# EAGLE board pcb_v2.1 (EAGLE 9.1.0)
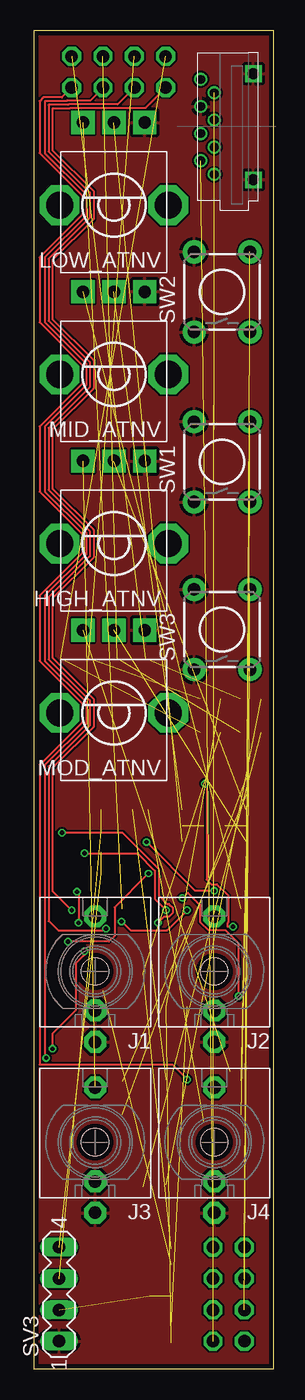
[diagram p0: board, top side]
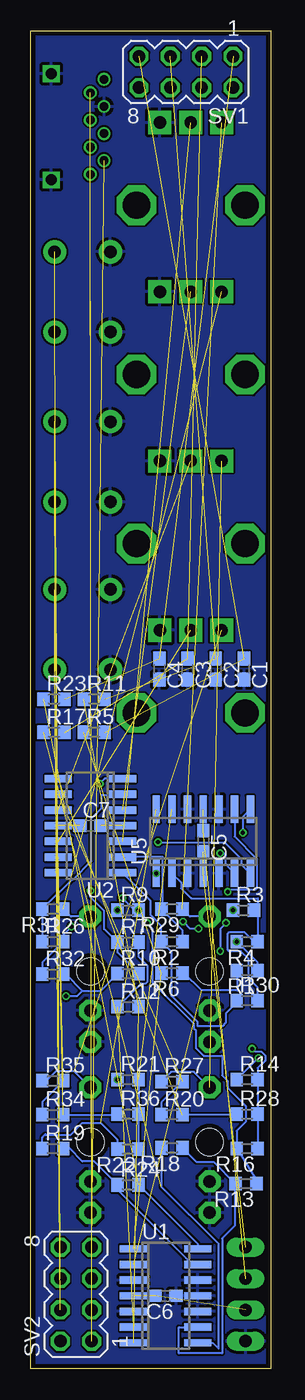
[diagram p1: board, bottom side, seen from below]

Size 19.43 x 108.43 mm. Coordinates in mm from the lower left corner, seen from the top.
Outline: 0,0 19.43,0 19.43,108.43 0,108.43 0,0
Copper layers (1*16): Top 0.035559375mm / dielectric 1.6mm / Bottom 0.035559375mm
Design rules "oshpark-2layer": minimum track width 6mil, minimum drill 10mil, track to track 6mil, track to pad 6mil, pad to pad 6mil, via to via 6mil, smd to smd 6mil, copper to edge 15mil, drill to drill 6mil, minimum pad ring 5mil, minimum via ring 5mil, stop-mask expansion 2.5mil, vias tented up to drill 0mil, thermal gap 10mil

## Footprints (pad centres in the part's own frame; a part is rotated, then mirrored left to right if it is on the bottom)
C0603 = smd 1.1 x 1: 1 -0.85,0; 2 0.85,0
ALPS_POT_VERTICAL = drill 1 pad 1.88 square: P$1 -2.5,6.7; P$2 0,6.7; P$3 2.5,6.7 | drill 2.2 pad 3.175 octagon: P$4 -4.4,0; P$5 4.4,0
WQP_PJ_301M6 = drill 1.016 pad 1.778 octagon: P1 0,-5.715; P2 0,-3.175; P3 0,4.445 | hole 2.2: 0,0
R0603 = smd 1 x 1.1: 1 -0.85,0; 2 0.85,0
MA04-2 = drill 1.016 octagon: 1 -3.81,-1.27; 2 -3.81,1.27; 3 -1.27,-1.27; 4 -1.27,1.27; 5 1.27,-1.27; 6 1.27,1.27; 7 3.81,-1.27; 8 3.81,1.27
MA04-1 = drill 1.016 long: 1 -3.81,0; 2 -1.27,0; 3 1.27,0; 4 3.81,0
TACTILE-PTH = drill 1.016 pad 1.88: 1 -3.251,2.261; 2 3.251,2.261; 3 -3.251,-2.261; 4 3.251,-2.261
SO14 = smd 0.6 x 2.2: 1 -3.81,-2.6; 2 -2.54,-2.6; 3 -1.27,-2.6; 4 0,-2.6; 5 1.27,-2.6; 6 2.54,-2.6; 7 3.81,-2.6; 8 3.81,2.6; 9 2.54,2.6; 10 1.27,2.6; 11 0,2.6; 12 -1.27,2.6; 13 -2.54,2.6; 14 -3.81,2.6
YAMAICHI_MICROSD_VERTICAL = drill 0.9 square: GND1 -4.3,-3.17; GND2 4.3,-3.17 | drill 0.7: P$1 -3.85,0; P$2 -2.75,1.1; P$3 -1.65,0; P$4 -0.55,1.1; P$5 0.55,0; P$6 1.65,1.1; P$7 2.75,0; P$8 3.85,1.1

## Placement (x,y rotation side)
C1  100n  [C0603]  2.16,56.71 270 bottom
C2  100n  [C0603]  4.45,56.71 270 bottom
C3  100n  [C0603]  6.73,56.71 270 bottom
C4  100n  [C0603]  9.02,56.71 270 bottom
C5  100n  [C0603]  5.46,42.74 270 bottom
C6  100n  [C0603]  8.51,5.91 180 bottom
C7  100n  [C0603]  14.61,44.01 0 bottom
HIGH_ATNV  10kB  [ALPS_POT_VERTICAL]  6.48,66.87 0 top
J1  PJ301_THONKICONN6  [WQP_PJ_301M6]  4.95,32.19 0 top
J2  PJ301_THONKICONN6  [WQP_PJ_301M6]  14.61,32.19 0 top
J3  PJ301_THONKICONN6  [WQP_PJ_301M6]  4.95,18.35 0 top
J4  PJ301_THONKICONN6  [WQP_PJ_301M6]  14.61,18.35 0 top
LOW_ATNV  10kB  [ALPS_POT_VERTICAL]  6.48,94.3 0 top
MID_ATNV  10kB  [ALPS_POT_VERTICAL]  6.48,80.58 0 top
MOD_ATNV  10kB  [ALPS_POT_VERTICAL]  6.48,53.15 0 top
R1  10k  [R0603]  1.91,32.27 180 bottom
R2  100k  [R0603]  8,34.61 180 bottom
R3  100k  [R0603]  2.21,37.15 0 bottom
R4  100k  [R0603]  1.91,34.61 180 bottom
R5  100  [R0603]  14.3,51.57 0 bottom
R6  10k  [R0603]  8,32.07 180 bottom
R7  10k  [R0603]  11.56,34.56 0 bottom
R9  100k  [R0603]  11.56,37.15 0 bottom
R10  100k  [R0603]  11.56,32.02 0 bottom
R11  100  [R0603]  14.3,54.27 0 bottom
R12  10k  [R0603]  11.56,29.32 0 bottom
R13  10k  [R0603]  2.01,15 180 bottom
R14  100k  [R0603]  1.91,23.43 0 bottom
R16  100k  [R0603]  1.91,17.84 180 bottom
R17  100  [R0603]  17.55,51.57 0 bottom
R18  10k  [R0603]  8,17.89 180 bottom
R19  10k  [R0603]  17.65,17.84 0 bottom
R20  100k  [R0603]  8,20.59 0 bottom
R21  100k  [R0603]  11.56,23.43 0 bottom
R22  100k  [R0603]  11.56,17.79 180 bottom
R23  100  [R0603]  17.55,54.27 0 bottom
R24  10k  [R0603]  11.56,14.9 0 bottom
R26  100k  [R0603]  17.65,34.61 0 bottom
R27  100k  [R0603]  8,23.28 0 bottom
R28  100k  [R0603]  1.91,20.64 0 bottom
R29  100k  [R0603]  8,37.25 180 bottom
R30  100k  [R0603]  1.91,29.83 0 bottom
R31  100k  [R0603]  17.65,37.25 180 bottom
R32  100k  [R0603]  17.65,31.97 0 bottom
R34  100k  [R0603]  17.65,20.59 0 bottom
R35  100k  [R0603]  17.65,23.33 0 bottom
R36  100k  [R0603]  11.56,20.64 0 bottom
SV1  [MA04-2]  6.86,105.09 180 bottom
SV2  [MA04-2]  15.77,6.03 90 bottom
SV3  [MA04-1]  2.03,6.03 90 top
SW1  [TACTILE-PTH]  15.24,73.49 90 top
SW2  [TACTILE-PTH]  15.24,87.26 90 top
SW3  [TACTILE-PTH]  15.24,59.91 90 top
U1  MCP6004  [SO14]  8.51,5.91 270 bottom
U2  TL074_SMD  [SO14]  14.61,44.01 90 bottom
U5  TL074  [SO14]  5.46,42.74 0 bottom
U$1  YAMAICHI_SD_CARD  [YAMAICHI_MICROSD_VERTICAL]  14.61,100.65 90 top

## Library data of the parts
C1-C7 = rcl; SPICEPREFIX: C
HIGH_ATNV LOW_ATNV MID_ATNV MOD_ATNV = og-pots
J1-J4 = og-pj301; SPICEPREFIX: J
R1-R7 R9-R14 R16-R24 R26-R32 R34-R36 = rcl; SPICEPREFIX: R
SV1-SV3 = con-lstb; OC_FARNELL: unknown; OC_NEWARK: unknown
SW1-SW3 = SparkFun
U1 U2 U5 U$1 = MusicThingModular

## Nets
3V: C6.2 SV3.2 U1.4
12V: C5.2 SV3.4 U5.4
-12V: C5.1 SV3.3 U5.11
CLK: SV2.3 U$1.P$5
GND: C1.2 C2.2 C3.2 C4.2 C6.1 HIGH_ATNV.P$3 J1.P1 J1.P2 J2.P1 J2.P2 J3.P1 J3.P2 J4.P1 J4.P2 LOW_ATNV.P$3 MID_ATNV.P$3 MOD_ATNV.P$3 SV3.1 SW1.1 SW1.2 SW2.1 SW2.2 SW3.1 SW3.2 U1.3 U1.5 U1.10 U1.11 U1.12 U5.3 U5.5 U5.10 U5.12 U$1.GND1 U$1.GND2 U$1.P$6
HIGH_IN: R14.1 SV1.4
HIGH_OUT: C3.1 R17.2 SV1.3
LOW_IN: R3.1 SV1.8
LOW_OUT: C1.1 R5.2 SV1.7
MID_IN: R9.1 SV1.6
MID_OUT: C2.1 R11.2 SV1.5
MISO: SV2.1 U$1.P$7
MOD_IN: R21.1 SV1.2
MOD_OUT: C4.1 R23.2 SV1.1
MOSI: SV2.5 U$1.P$3
N$1: R2.1 R29.2 U2.2
N$2: R26.1 R31.2 U2.6
N$3: R2.2 R30.1 U2.1
N$4: R1.1 R4.2 U5.1
N$5: R5.1 R6.2 U1.1
N$6: R20.1 R27.2 U2.9
N$7: HIGH_ATNV.P$2 U2.10
N$8: R9.2 R10.1 R32.2 U5.6
N$9: R7.1 R10.2 U5.7
N$10: LOW_ATNV.P$2 U2.3
N$11: MID_ATNV.P$2 U2.5
N$12: HIGH_ATNV.P$1 J3.P3 R27.1
N$13: R20.2 R28.1 U2.8
N$14: R13.1 R16.2 U5.8
N$15: R34.1 R35.2 U2.13
N$16: U$1.P$4
N$19: R19.1 R22.2 U5.14
N$20: R1.2 R6.1 U1.2
N$22: R7.2 R12.1 U1.6
N$23: R13.2 R18.1 U1.9
N$24: R19.2 R24.1 U1.13
N$26: R11.1 R12.2 U1.7
N$27: R17.1 R18.2 U1.8
N$28: R23.1 R24.2 U1.14
N$30: J1.P3 LOW_ATNV.P$1 R29.1
N$31: R3.2 R4.1 R30.2 U5.2
N$32: J2.P3 MID_ATNV.P$1 R31.1
N$33: R26.2 R32.1 U2.7
N$34: MOD_ATNV.P$2 U2.12
N$35: J4.P3 MOD_ATNV.P$1 R35.1
N$36: R34.2 R36.1 U2.14
N$37: R14.2 R16.1 R28.2 U5.9
N$38: R21.2 R22.1 R36.2 U5.13
SS: SV2.7 U$1.P$2
SV2_2: SV2.2
SW_HIGH: SV2.4 SW3.3 SW3.4
SW_LOW: SV2.8 SW1.3 SW1.4
SW_MID: SV2.6 SW2.3 SW2.4
V+: C7.2 U2.4
V-: C7.1 U2.11

## Tracks (layer width: path | path; a pad name or v marks a point on that pad's centre or on a via)
3V  (2 unrouted)
12V  (2 unrouted)
-12V  (2 unrouted)
CLK  (1 unrouted)
GND
  pour Bottom: -0.13,108.52 19.68,108.52 19.68,-0.7 0.38,-0.7 -0.13,-0.19
  pour Top: -0.64,109.03 20.19,109.03 20.19,-0.7 19.68,-1.21 0.38,-1.21 -0.64,-0.19
HIGH_IN  (via drill 0.35)
  Top 0.152: SV1.4 4.54,102.78 2.69,102.78 2.64,102.73 0.89,102.73 0.89,98.51 4.22,95.18 4.22,93.41 0.89,90.08 0.89,84.8 4.22,81.47 4.22,79.69 0.89,76.37 0.89,71.08 4.22,67.75 4.22,65.98 0.89,62.65 0.89,57.37 4.22,54.04 4.22,52.26 0.97,49.01 0.89,48.93 0.89,26.53 | 0.89,26.53 | 0.89,26.53 0.89,25.28 v0.99,25.18
  Bottom 0.152: v0.99,25.18 2.74,23.43 R14.1
HIGH_OUT  (2 unrouted)
LOW_IN  (via drill 0.35)
  Top 0.152: SV1.8 9.01,102.17 2.94,102.17 2.9,102.12 1.5,102.12 1.5,98.77 4.83,95.44 4.83,93.16 1.5,89.83 1.5,85.05 4.83,81.72 4.83,79.44 1.5,76.11 1.5,71.33 4.83,68.01 4.83,65.73 1.5,62.4 1.5,57.62 4.83,54.29 4.83,52.01 1.7,48.88 1.5,48.68 1.5,38.71 R3.1
  other vias: 3.06,37.15
LOW_OUT  (2 unrouted)
MID_IN  (via drill 0.35)
  Top 0.152: SV1.6 6.78,102.47 2.82,102.47 2.77,102.43 1.19,102.43 1.19,98.64 4.52,95.31 4.52,93.28 1.19,89.95 1.19,84.92 4.52,81.59 4.52,79.57 1.19,76.24 1.19,71.21 4.52,67.88 4.52,65.85 1.19,62.52 1.19,57.49 4.52,54.16 4.52,52.14 1.19,48.81 1.19,36.28 1.96,35.52 5.77,35.52 5.84,35.6 v5.84,35.65 | R9.1 10.78,35.52 7.82,35.52 v7.1,36.24
  Bottom 0.152: v5.84,35.65 6.5,35.65 v7.1,36.24
  other vias: 12.41,37.15
MID_OUT  (2 unrouted)
MISO  (1 unrouted)
MOD_IN  (via drill 0.35)
  Top 0.152: SV1.2 2.26,103.04 0.76,103.04 0.46,102.73 0.46,98.51 3.91,95.06 3.91,93.54 0.46,90.08 0.46,84.8 3.91,81.34 3.91,79.82 0.46,76.36 0.46,71.08 3.91,67.63 3.91,66.1 0.46,62.65 0.46,57.37 3.91,53.91 3.91,52.39 0.46,48.93 0.46,24.65 11.19,24.65 R21.1
  other vias: 12.41,23.43
MOD_OUT  (2 unrouted)
MOSI  (1 unrouted)
N$1
  Bottom 0.152: U2.2 8.74,41.47 8.74,37.36 R29.2 7.15,35.55 R2.1
N$2
  Bottom 0.152: R26.1 R31.2 16.08,39.67 16.01,39.67 14.53,41.14 14.53,44.6 13.69,45.44 13.69,46.49 12.06,46.49 U2.6
N$3
  Bottom 0.152: U2.1 9.73,37.92 9.73,36.76 8.85,35.88 R2.2 8.03,33.79 8.03,30.2 5.92,28.09 5.92,27.75 3.94,27.75 3.62,28.06 3.62,28.81 2.75,29.68 R30.1
N$4  (via drill 0.35)
  Top 0.152: U5.1 6.53,37.39 6.53,35.06 6.07,34.61 R4.2
  Bottom 0.152: R4.2 1.05,32.91 R1.1 | U5.1
  other vias: 9.27,40.14 2.75,34.61
N$5  (2 unrouted)
N$6  (1 unrouted)
  Bottom 0.152: R27.2 8.85,21.58 R20.1
N$7  (1 unrouted)
N$8  (via drill 0.35)
  Top 0.152: R9.2 9.8,38.05 9.8,40.36 8.39,41.77 v4.09,41.77 | v16.59,30.19 16.59,34.46 15.52,35.52 14.14,35.52 13.49,36.18 13.49,37.55 12.47,38.57 12.05,38.15 v12.01,38.15
  Bottom 0.152: U5.6 3.63,40.85 3.63,41.62 3.79,41.77 v4.09,41.77 | R32.2 16.58,31.97 15.25,30.64 | 15.25,30.64 13.79,30.64 R10.1 | 15.25,30.64 15.7,30.19 v16.59,30.19 | v12.01,38.15 11.01,37.15 R9.2
  other vias: 10.71,37.15
N$9  (via drill 0.35)
  Top 0.152: v14.61,38.72 13.08,38.72 v9.12,42.68
  Bottom 0.152: U5.7 2.39,40.88 2.39,41.33 3.73,42.66 9.1,42.66 v9.12,42.68 | R10.2 12.41,33.72 R7.1 13.49,35.64 13.49,37.1 14.61,38.22 v14.61,38.72
N$10  (1 unrouted)
N$11  (1 unrouted)
N$12  (1 unrouted)
  Bottom 0.152: J3.P3 6.21,24.06 8.07,24.06 R27.1
N$13  (1 unrouted)
  Bottom 0.152: R28.1 2.81,20.59 R20.2
N$14  (via drill 0.35)
  Top 0.152: v2.26,43.45 7.14,43.45 10.11,40.48 10.11,38.34 10.77,37.68 10.93,37.68 11.24,37.37 11.24,36.93 10.93,36.62 10.52,36.62 v10.03,36.13
  Bottom 0.152: R13.1 1.05,15.1 R16.2 2.75,19.26 2.03,19.99 2.03,21.28 3.48,22.74 3.48,23.33 3.94,23.79 3.94,25.31 3.99,25.36 5.42,25.36 6.07,26.02 6.07,27.44 6.22,27.6 6.22,27.96 9.58,31.32 9.58,35.68 v10.03,36.13 | U5.8 2.26,44.73 v2.26,43.45
N$15  (1 unrouted)
  Bottom 0.152: R35.2 18.5,21.63 R34.1
N$19  (1 unrouted)
  Bottom 0.152: 18.3,18.94 18.5,18.74 R19.1 | 18.3,18.94 18.24,18.99 | R22.2 12.44,17.82 12.44,18.57 13.78,19.91 15.25,19.91 16.21,18.94 18.3,18.94
N$20  (1 unrouted)
  Bottom 0.152: R6.1 7.03,32.07 5.6,30.64 2.69,30.64 R1.2
N$22  (1 unrouted)
  Bottom 0.152: R7.2 10.71,33.39 9.98,32.66 9.98,31.37 10.11,31.24 10.49,31.24 R12.1
N$23
  Bottom 0.152: R18.1 6.02,16.76 4.62,16.76 R13.2 2.92,14.93 2.92,11.56 3.94,10.55 3.94,1.23 7.43,1.23 7.43,3.37 U1.9
N$24
  Bottom 0.152: R19.2 16.3,17.84 15.25,16.79 14.3,16.79 R24.1 12.41,14.49 6.36,8.45 U1.13
N$26  (2 unrouted)
N$27  (1 unrouted)
  Bottom 0.152: R18.2 8.85,14.75 4.24,10.14 4.24,1.65 4.69,2.1 U1.8
N$28  (1 unrouted)
  Bottom 0.152: R24.2 5.91,10.1 U1.14
N$30  (1 unrouted)
  Bottom 0.152: J1.P3 6.54,36.64 R29.1
N$31
  Bottom 0.152: R30.2 1.05,30.9 1.78,31.63 1.78,33.21 2.41,33.83 3.35,33.83 3.48,33.96 3.48,35.25 3.35,35.39 2.16,35.39 1.38,34.61 R4.1 1.05,36.84 R3.2 1.04,37.47 1.04,38.11 6.43,38.11 7.26,38.94 7.26,39.39 U5.2
N$32  (1 unrouted)
  Bottom 0.152: J2.P3 16.19,36.64 R31.1
N$33  (via drill 0.35)
  Top 0.152: v13.84,47.41 14,47.26 14,39.64 14.38,39.25 14.83,39.25 15.72,38.36 15.72,36.18 15.67,36.12 15.67,35.83 v16.13,35.83
  Bottom 0.152: R32.1 18.5,32.91 R26.2 16.8,35.15 v16.13,35.83 | U2.7 13.44,47.82 v13.84,47.41
N$34  (1 unrouted)
N$35  (1 unrouted)
  Bottom 0.152: R35.1 18.18,23.33 17.4,24.11 15.92,24.11 J4.P3
N$36  (1 unrouted)
  Bottom 0.152: R34.2 12.46,20.59 R36.1
N$37  (via drill 0.35)
  Top 0.152: v3.48,38.64 3.61,38.51 v3.61,36.13 | v4.09,33.85 4.09,33.53 3.4,32.84 3.4,29.04 1.5,27.14 v1.5,25.92
  Bottom 0.152: R16.1 R28.2 R14.2 1.05,24.36 0.46,24.96 0.46,25.4 0.77,25.71 1.29,25.71 v1.5,25.92 | v3.48,38.64 3.32,38.81 1.26,38.81 1.12,38.94 1.12,41.33 2.92,43.13 U5.9 | v3.61,36.13 4.09,35.66 v4.09,33.85
N$38  (1 unrouted)
  Bottom 0.152: R21.2 R36.2 R22.1
SS  (1 unrouted)
SW_HIGH  (2 unrouted)
SW_LOW  (2 unrouted)
SW_MID  (2 unrouted)
V+  (1 unrouted)
V-  (1 unrouted)